# Altium PCB PCBFinal.PcbDoc
Units mm, origin at the board's own origin, x right, y up, seen from the top; angles counter-clockwise.
Board outline 97.5 x 97.5 mm, 2 copper layers (Top Layer, Bottom Layer), stack 0.671 mm thick; 19 components, 15 nets, 70 pads, 9 vias.
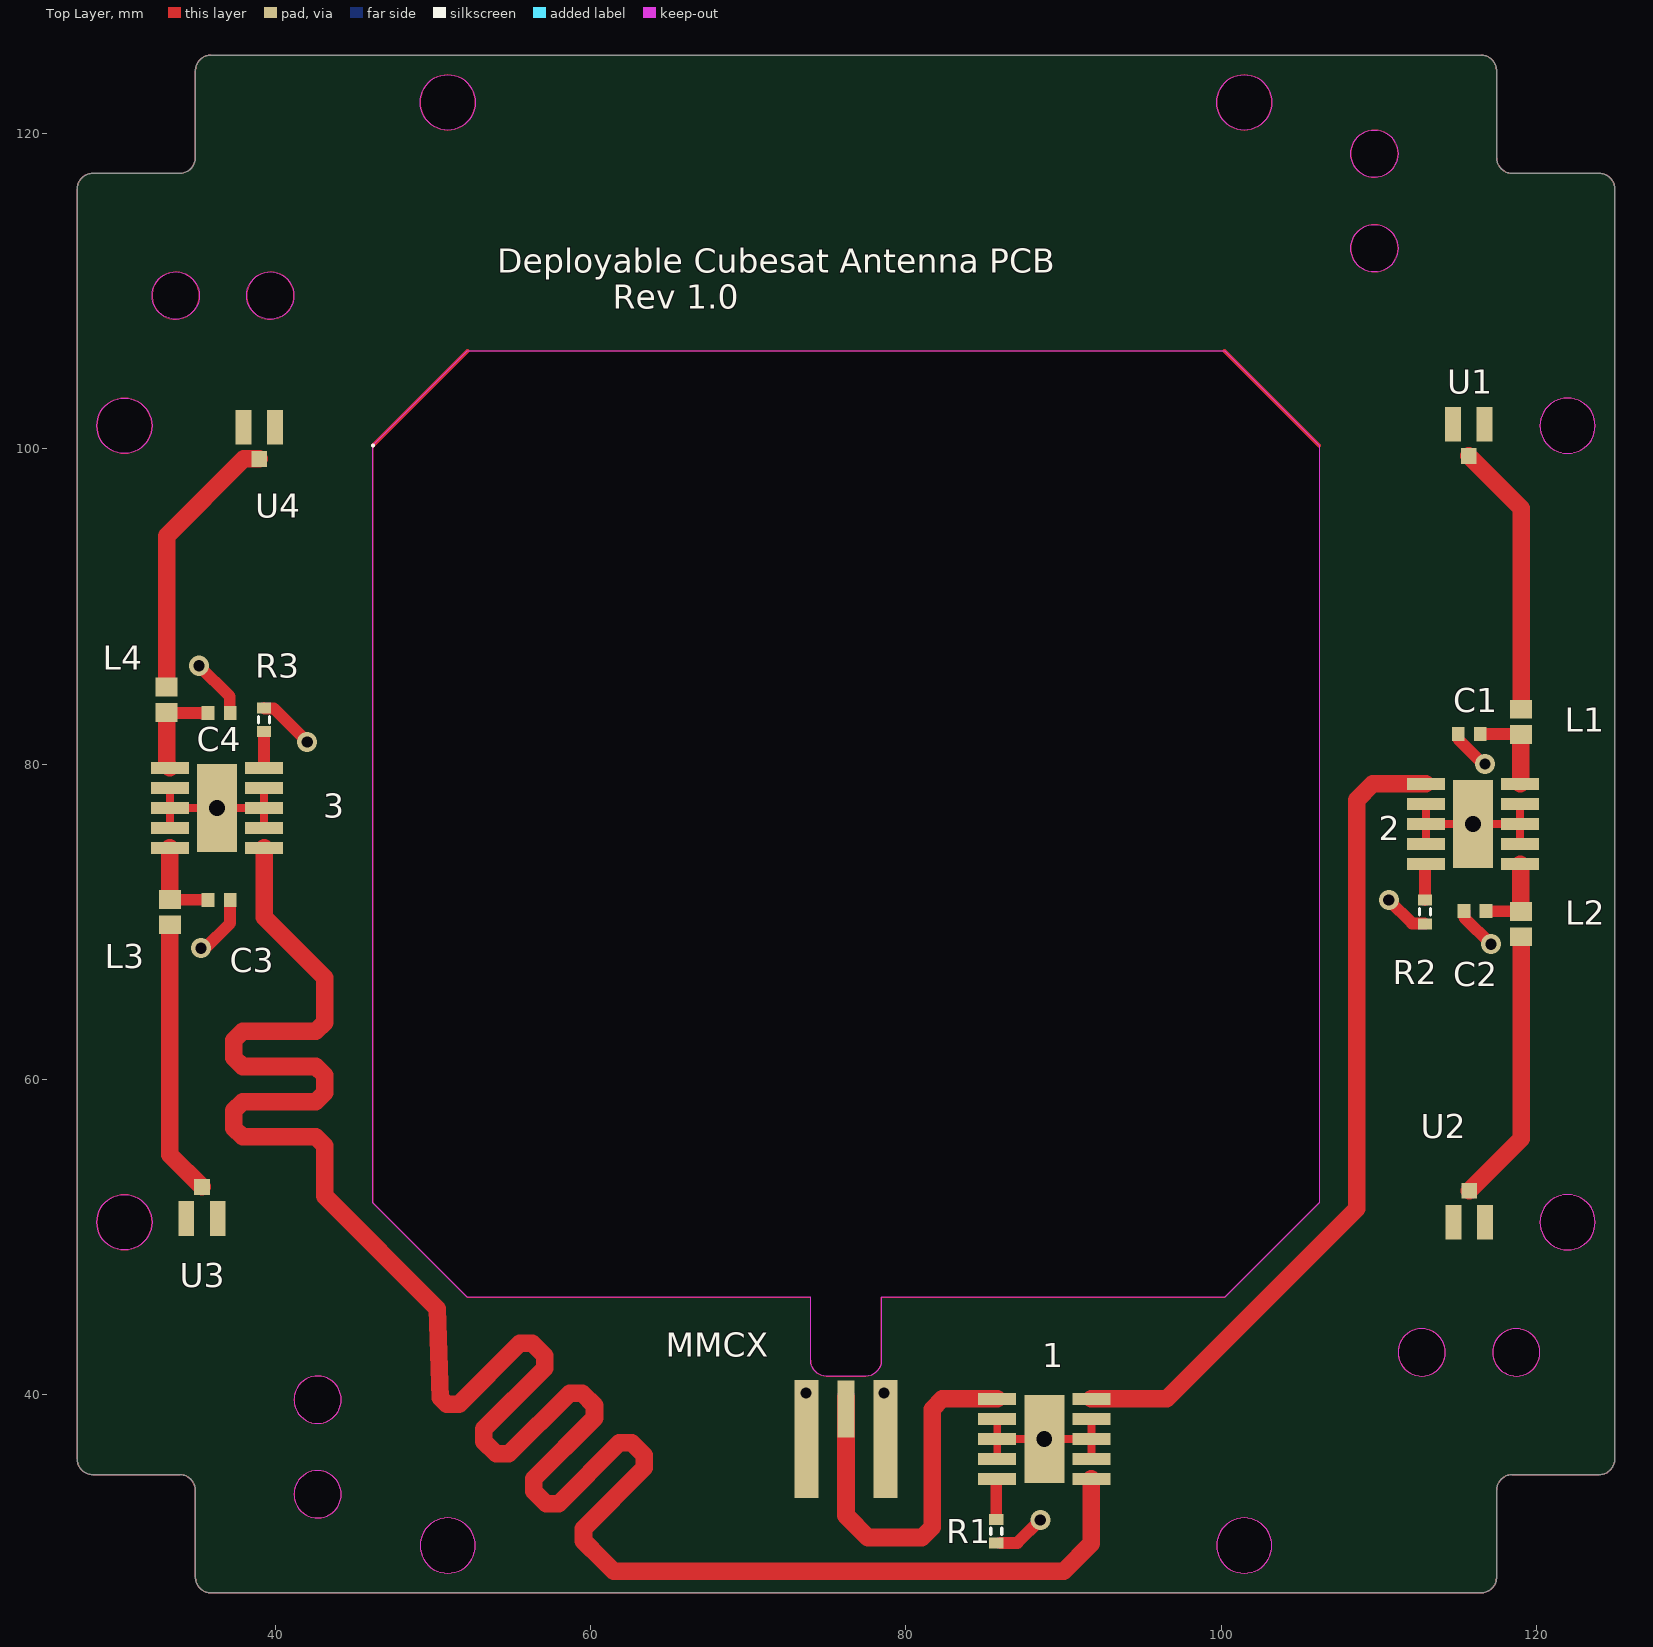
[diagram p0: Top Layer view]
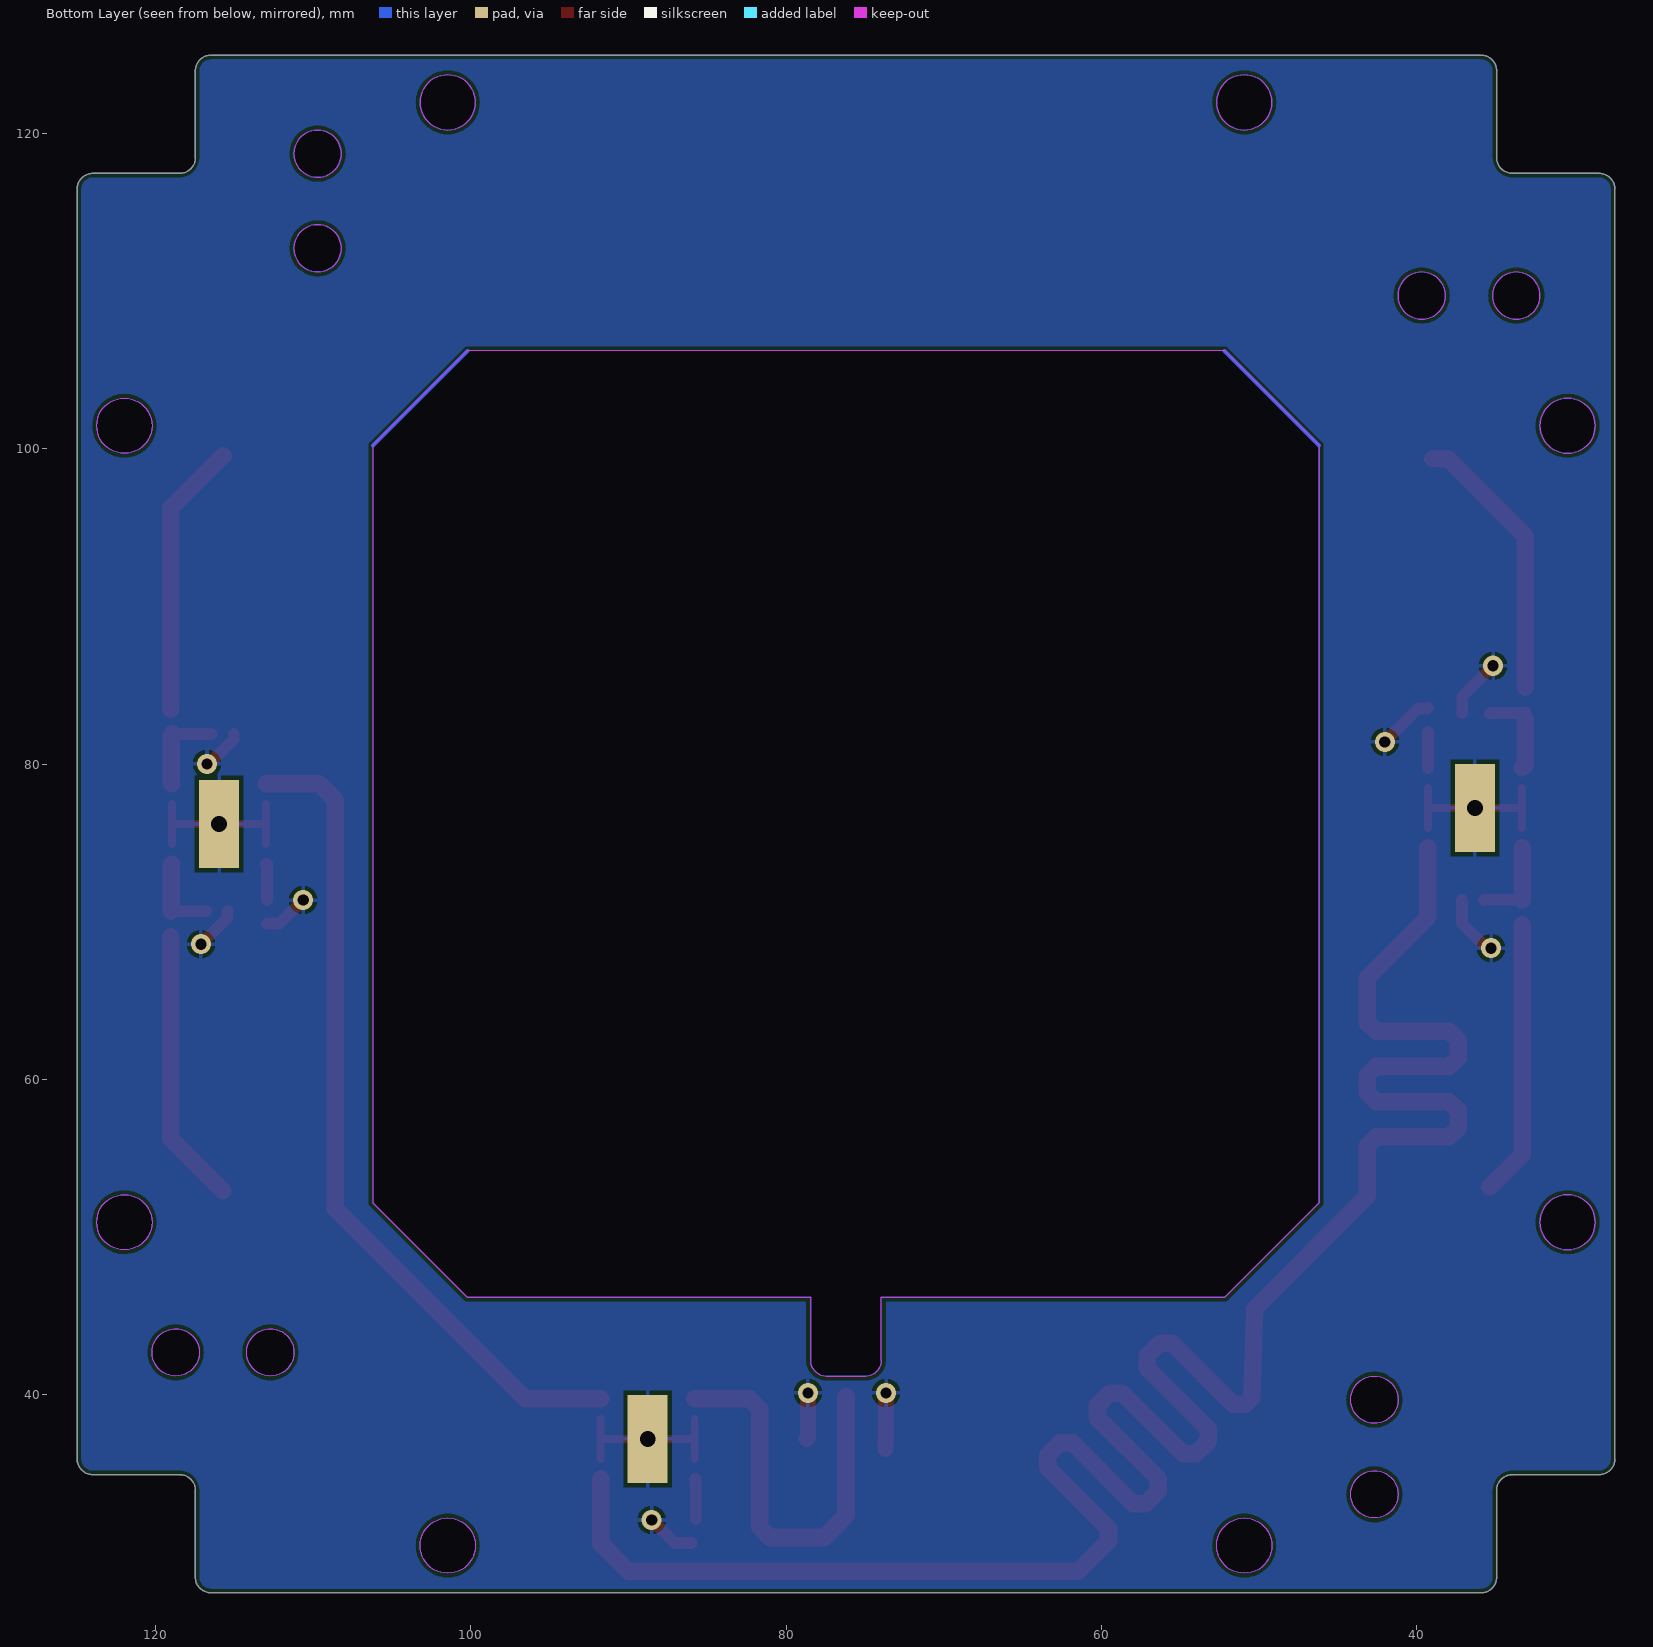
[diagram p1: Bottom Layer view, seen from below]

## Layer stack, top to bottom
Top Solder: solder mask 0.0102, Solder Resist, Dk 3.5
Top Layer: signal copper 0.0356
Dielectric 1: dielectric 0.6, FR-4, Dk 4.5
Bottom Layer: signal copper 0.0356

## Board outline
34.95,28.45 ccw(c35.95,28.45) 35.95,27.45 116.45,27.45 ccw(c116.45,28.45) 117.45,28.45 117.45,33.95 cw(c118.45,33.95) 118.45,34.95 123.95,34.95 ccw(c123.95,35.95) 124.95,35.95 124.95,116.45 ccw(c123.95,116.45) 123.95,117.45 118.45,117.45 cw(c118.45,118.45) 117.45,118.45 117.45,123.95 ccw(c116.45,123.95) 116.45,124.95 35.95,124.95 ccw(c35.95,123.95) 34.95,123.95 34.95,118.45 cw(c33.95,118.45) 33.95,117.45 28.45,117.45 ccw(c28.45,116.45) 27.45,116.45 27.45,35.95 ccw(c28.45,35.95) 28.45,34.95 33.95,34.95 cw(c33.95,33.95) 34.95,33.95
cut-out: 41.2,33.7 ccw(c42.7,33.7) 42.7,32.2 ccw(c42.7,33.7) 44.2,33.7 ccw(c42.7,33.7) 42.7,35.2 ccw(c42.7,33.7)
cut-out: 41.2,39.7 ccw(c42.7,39.7) 42.7,38.2 ccw(c42.7,39.7) 44.2,39.7 ccw(c42.7,39.7) 42.7,41.2 ccw(c42.7,39.7)
cut-out: 50.95,120.2 cw(c50.95,121.95) 49.2,121.95 cw(c50.95,121.95) 50.95,123.7 cw(c50.95,121.95) 52.7,121.95 cw(c50.95,121.95)
cut-out: 33.7,108.2 cw(c33.7,109.7) 32.2,109.7 cw(c33.7,109.7) 33.7,111.2 cw(c33.7,109.7) 35.2,109.7 cw(c33.7,109.7)
cut-out: 39.7,108.2 cw(c39.7,109.7) 38.2,109.7 cw(c39.7,109.7) 39.7,111.2 cw(c39.7,109.7) 41.2,109.7 cw(c39.7,109.7)
cut-out: 30.45,99.7 cw(c30.45,101.45) 28.7,101.45 cw(c30.45,101.45) 30.45,103.2 cw(c30.45,101.45) 32.2,101.45 cw(c30.45,101.45)
cut-out: 30.45,99.7 cw(c30.45,101.45) 28.7,101.45 cw(c30.45,101.45) 30.45,103.2 cw(c30.45,101.45) 32.2,101.45 cw(c30.45,101.45)
cut-out: 30.45,49.2 cw(c30.45,50.95) 28.7,50.95 cw(c30.45,50.95) 30.45,52.7 cw(c30.45,50.95) 32.2,50.95 cw(c30.45,50.95)
cut-out: 49.2,30.45 ccw(c50.95,30.45) 50.95,28.7 ccw(c50.95,30.45) 52.7,30.45 ccw(c50.95,30.45) 50.95,32.2 ccw(c50.95,30.45)
cut-out: 99.7,30.45 ccw(c101.45,30.45) 101.45,28.7 ccw(c101.45,30.45) 103.2,30.45 ccw(c101.45,30.45) 101.45,32.2 ccw(c101.45,30.45)
cut-out: 111.2,42.7 ccw(c112.7,42.7) 112.7,41.2 ccw(c112.7,42.7) 114.2,42.7 ccw(c112.7,42.7) 112.7,44.2 ccw(c112.7,42.7)
cut-out: 117.2,42.7 ccw(c118.7,42.7) 118.7,41.2 ccw(c118.7,42.7) 120.2,42.7 ccw(c118.7,42.7) 118.7,44.2 ccw(c118.7,42.7)
cut-out: 120.2,50.95 ccw(c121.95,50.95) 121.95,49.2 ccw(c121.95,50.95) 123.7,50.95 ccw(c121.95,50.95) 121.95,52.7 ccw(c121.95,50.95)
cut-out: 120.2,101.45 ccw(c121.95,101.45) 121.95,99.7 ccw(c121.95,101.45) 123.7,101.45 ccw(c121.95,101.45) 121.95,103.2 ccw(c121.95,101.45)
cut-out: 109.7,111.2 cw(c109.7,112.7) 108.2,112.7 cw(c109.7,112.7) 109.7,114.2 cw(c109.7,112.7) 111.2,112.7 cw(c109.7,112.7)
cut-out: 109.7,117.2 cw(c109.7,118.7) 108.2,118.7 cw(c109.7,118.7) 109.7,120.2 cw(c109.7,118.7) 111.2,118.7 cw(c109.7,118.7)
cut-out: 101.45,120.2 cw(c101.45,121.95) 99.7,121.95 cw(c101.45,121.95) 101.45,123.7 cw(c101.45,121.95) 103.2,121.95 cw(c101.45,121.95)
cut-out: 52.2,46.2 46.2,52.2 46.2,100.2 52.2,106.2 100.2,106.2 106.2,100.2 106.2,52.2 100.2,46.2 78.45,46.2 78.45,42.2 cw(c77.45,42.2) 77.45,41.2 74.95,41.2 cw(c74.95,42.2) 73.95,42.2 73.95,46.2

## Design rules (kind name [scope] priority, off if disabled: settings)
Clearance [All] p1: gap=0.254 ignorepadtopadclearanceinfootprint=FALSE except(0: Arc-Hole Track-Hole SMDPad-Hole THPad-Hole Via-Hole Fill-Hole Poly-Hole Region-Hole Text-Hole)
PolygonConnect [All] p1: connectstyle=Relief reliefconductorwidth=0.254 reliefentries=4 polygonreliefangle="90 Angle" airgapwidth=0.254
RoomDefinition PCBSchematic [InComponentClass('PCBSchematic')] p1: confinementstyle=ConfineIn formatcopy=TRUE lockcomponents=FALSE outline 22.344,10.668 128.516,10.668 128.516,131.445 22.344,131.445
RoutingVias [All] p1: holewidth=0.711 width=1.27 viastyle="Through Hole" minholewidth=0.711 minwidth=1.27 maxholewidth=0.711 maxwidth=1.27
SolderMaskExpansion [All] p1: expansion=0.102
Width [All] p1: maxlimit=1.116 minlimit=0.5 preferedwidth=1 minimp=50.000000 maximp=50.000000 favimp=50.000000
30 further rules are at their usual default settings.

## Classes and differential pairs
component class PCBSchematic: 1 2 3 C1 C2 C3 C4 L1 L2 L3 MMCX R2 U1 U2 U3 U4

## Components (designator, comment, footprint, x,y, rotation, side; value= is the part's Value field where it differs from the comment)
1 "DNP" QBA07 85.788,34.671 r90 top
2 "DNP" QBA07 112.966,73.66 r90 top
3 "DNP" QBA07 39.306,79.756 r270 top
C1 "Cap Semi" 1608[0603] 115.714,81.915 r180 top value=15pF
C2 "Cap Semi" 1608[0603] 116.078,70.682 r0 top value=15pF
C3 "Cap Semi" 1608[0603] 36.449,71.374 r0 top value=15pF
C4 "Cap Semi" 1608[0603] 36.449,83.229 r180 top value=15pF
L1 "Inductor" 2029 118.999,82.677 r90 top value=18mH
L2 "Inductor" 2029 118.999,69.85 r90 top value=18mH
L3 "Inductor" 2029 33.337,70.612 r270 top value=18mH
L4 "Inductor" 2029 33.126,84.074 r90 top value=18mH
MMCX "DNP" MMCX 73.7,37.211 r0 top
R1 "Res3" J1-0603 85.725,31.369 r270 top value=50
R2 "Res3" J1-0603 112.903,70.624 r270 top value=50
R3 "Res3" J1-0603 39.306,82.804 r90 top value=50
U1 "DNP" U.fl 115.68,99.536 r0 top
U2 "DNP" U.fl 115.714,52.95 r180 top
U3 "DNP" U.fl 35.368,53.193 r180 top
U4 "DNP" U.fl 39,99.346 r0 top

## Footprints (in the part's own frame and the unit in brackets; to place one, negate y for a bottom-side part, rotate by r counter-clockwise, add the part's x,y. Pads: shape width x height; smd on the part's side, far side on the other; paste and mask are expansions set on the pad)
1608[0603] [mm] "Chip Capacitor, Body 1.6x0.8mm, IPC High Density"
  rect 0.8x0.9 smd: 1(-0.7,0) 2(0.7,0)
  body extent -0.87,-0.48 0.87,0.48, height 1.3
2029 [mm] "Chip Inductor, Body 2.0x1.2mm, IPC High Density"
  rect 1.2x1.4 smd: 1(-0.8,0) 2(0.8,0)
  body extent -1.1,-0.7 1.1,0.7, height 0.55
J1-0603 [mm] "Chip Resistor, Body 1.6x0.8mm, IPC High Density"
  rect 0.7x0.9 smd: 1(-0.75,0) 2(0.75,0)
  silkscreen extent -0.2,-0.35 0.2,0.35, body extent -0.85,-0.48 0.85,0.48, height 0.9
MMCX [mm]
  rect 1.5x7.5 smd: 7(0,0) 9(5,0)
  rect 1.1x3.624 smd: 8(2.5,1.905)
  body extent -0.86,0.19 5.84,9.72, height 2.49
QBA07 [mm]
  rect 0.76x2.41 smd: 10(0,0) 11(1.27,0) 12(2.54,0) 13(3.81,0) 14(5.08,0) 15(5.08,-5.969) 16(3.81,-5.969) 17(2.54,-5.969) 18(1.27,-5.969) 19(0,-5.969)
  rect 5.588x2.54 hole 1: 31(2.54,-2.984)
  body extent -1.27,-6.98 6.35,1.15, height 1.5
U.fl [mm]
  rect 1x2.2 smd: 23(-0.999,2) 25(1,2)
  rect 1x1 smd: 24(0,0)
  body extent -1.5,0.1 1.5,3.2, height 1.25

## Part data
1 2 3: library part QBA-07
C1 C2 C3 C4: "Capacitor (Semiconductor SIM Model)", LatestRevisionDate=29-May-2009, LatestRevisionNote="IPC-7351 Footprint Added.", PackageDescription="Chip Capacitor", PackageReference=C1206, Published=8-Jun-2000, Publisher="Altium Limited"
MMCX: library part "MMCX Jack"
R1 R2 R3: "Resistor", LatestRevisionDate=29-May-2009, LatestRevisionNote="IPC-7351 Footprint Added.", PackageDescription="Chip Resistor", PackageReference=J1-0603, Published=8-Jun-2000, Publisher="Altium Limited"
U1 U2 U3 U4: library part U.fl
L1 L2 L3 L4: Code_IEC=1005, Code_JEITA=0402, LatestRevisionDate=29-May-2009, LatestRevisionNote="IPC-7351 Footprint Added.", PackageDescription="Chip Inductor", PackageReference=0402-A, Published=8-Jun-2000, Publisher="Altium Limited"

## Via types
v1: diameter 1.27, hole 0.711, Top Layer to Bottom Layer, 9 vias

## Nets (pads, with @x,y where several pads share a name; then routed paths per layer and width w, separated by ;. In a path a pad name is that pad's centre, name@x,y a point inside that pad or via, vN(x,y) a via of type N, cw(c..) or ccw(c..) an arc to the next point about the centre after c; other vN are vias at no path point)
GND: 1.11 1.12 1.13 1.16 1.17 1.18 1.31 2.11 2.12 2.13 2.16 2.17 2.18 2.31 3.11 3.12 3.13 3.16 3.17 3.18 3.31 C1.2 C2.1 C3.2 C4.1 MMCX.7 MMCX.9 R1.2 R2.2 R3.2 | length 62.7
  Top Layer w0.5: 3.16 3.17 ; 3.18 3.17 ; 3.13 3.12 ; 3.11 3.12 ; 1.11 1.12 ; 1.13 1.12 ; 1.18 1.17 ; 1.16 1.17 ; 2.11 2.12 ; 2.13 2.12 ; 2.18 2.17 ; 2.16 2.17 ; 3.17 3.31 3.12 ; 1.12 1.31 1.17 ; 2.12 2.31 2.17
  Top Layer w0.75: v1(35.179,86.233) 37.124,84.288 37.124,83.254 C4.1 ; v1(35.306,68.326) 35.56,68.326 37.149,69.915 C3.2 ; R3.2 39.331,83.529 39.915,83.529 v1(42.037,81.407) ; R1.2@85.979,30.619 87.065,30.619 v1(88.519,32.073) ; v1(110.617,71.374) 112.092,69.899 112.878,69.899 R2.2 ; C1.2 115.014,81.575 116.579,80.01 v1(116.713,80.01) ; C2.1 115.403,70.657 115.403,70.271 v1(117.094,68.58)
  Top Layer w1: v1(73.66,40.132) 73.66,37.171 MMCX.7 MMCX.7@73.7,36.576 ; v1(78.613,40.132) 78.613,37.298 MMCX.9
Net1_10: 1.10 R1.1 | length 2.6
  Top Layer w0.75: R1.1 85.725,34.666 85.73,34.671 1.10
Net1_14: 1.14 MMCX.8 | length 25.7
  Top Layer w1.116: MMCX.8@76.2,39.878 MMCX.8 76.2,32.357 77.597,30.96 81.007,30.96 81.661,31.614 81.661,39.097 82.315,39.751 1.14
Net1_15: 1.15 2.14 | length 52.5
  Top Layer w1.116: 1.15 96.532,39.751 108.585,51.804 108.585,77.724 109.601,78.74 2.14
Net1_19: 1.19 3.14 | length 146
  Top Layer w1.116: 3.14 39.306,70.294 40.767,68.834 40.777,68.824 42.355,67.246 43.145,66.456 43.145,65.289 43.145,63.615 42.587,63.057 37.946,63.057 37.388,62.499 37.388,61.383 37.946,60.825 42.587,60.825 43.145,60.267 43.145,59.151 42.587,58.593 37.946,58.593 37.388,58.035 37.388,56.919 37.946,56.361 42.587,56.361 43.145,55.803 43.145,55.245 43.145,52.613 50.292,45.466 50.482,39.814 50.877,39.42 51.666,39.42 55.523,43.276 56.312,43.276 57.101,42.487 57.101,41.698 53.244,37.842 53.244,37.053 54.034,36.263 54.823,36.263 58.679,40.12 59.468,40.12 60.258,39.331 60.258,38.542 56.401,34.685 56.401,33.896 57.19,33.107 57.979,33.107 61.836,36.963 62.625,36.963 63.414,36.174 63.414,35.385 59.558,31.529 59.558,30.739 60.741,29.556 61.468,28.829 62.357,28.829 90.004,28.829 91.757,30.582 1.19
Net2_10: 2.10 R2.1 | length 2.3
  Top Layer w0.75: R2.1 112.903,73.655 112.908,73.66 2.10
Net2_15: 2.15 C1.1 L1.1 | length 5.8
  Top Layer w0.75: C1.1 116.433,81.896 118.917,81.896 118.98,81.896 L1.1
  Top Layer w1.116: L1.1@118.898,81.915 118.917,81.896 118.967,81.845 118.967,78.772 2.15
Net2_19: 2.19 C2.2 L2.2 | length 5.2
  Top Layer w0.75: C2.2 116.794,70.666 118.983,70.666 L2.2
  Top Layer w1.116: 2.19 118.967,73.628 118.967,70.682 L2.2@118.983,70.666
Net3_10: 3.10 R3.1 | length 2.3
  Top Layer w0.75: 3.10 R3.1
Net3_15: 3.15 C3.1 L3.1 | length 5.5
  Top Layer w0.75: L3.1 33.356,71.393 35.73,71.393 C3.1
  Top Layer w1.116: L3.1 3.15@33.338,74.486
Net3_19: 3.19 C4.2 L4.1 | length 5.5
  Top Layer w0.75: L4.1 33.17,83.229 35.343,83.229 35.368,83.204 C4.2@35.368,83.185
  Top Layer w1.116: L4.1@33.147,82.881 33.147,79.934 33.325,79.756 3.19
NetL1_2: L1.2 U1.24 | length 17.4
  Top Layer w1.116: U1.24 118.999,96.217 L1.2
NetL2_1: L2.1 U2.24 | length 17.5
  Top Layer w1.116: U2.24 118.999,56.235 L2.1
NetL3_2: L3.2 U3.24 | length 17.5
  Top Layer w1.116: L3.2 33.338,55.223 U3.24
NetL4_1: L4.2 U4.24 | length 17.5
  Top Layer w1.116: L4.2 33.126,94.46 38.012,99.346 U4.24
pads on no net: U1.23 U1.25 U2.23 U2.25 U3.23 U3.25 U4.23 U4.25

## Polygon pours and split planes (outlines as drawn)
GND on Bottom Layer "Bottom Layer-GND" (solid, pour order 0): 34.95,28.45 ccw(c35.95,28.45) 35.95,27.45 116.45,27.45 ccw(c116.45,28.45) 117.45,28.45 117.45,33.95 cw(c118.45,33.95) 118.45,34.95 123.95,34.95 ccw(c123.95,35.95) 124.95,35.95 124.95,116.45 ccw(c123.95,116.45) 123.95,117.45 118.45,117.45 cw(c118.45,118.45) 117.45,118.45 117.45,123.95 ccw(c116.45,123.95) 116.45,124.95 35.95,124.95 ccw(c35.95,123.95) 34.95,123.95 34.95,118.45 cw(c33.95,118.45) 33.95,117.45 28.45,117.45 ccw(c28.45,116.45) 27.45,116.45 27.45,35.95 ccw(c28.45,35.95) 28.45,34.95 33.95,34.95 cw(c33.95,33.95) 34.95,33.95

## Other copper
Multi-Layer:
  circle w0.013: c42.7,33.7 r1.5
  circle w0.013: c42.7,33.7 r1.5
  circle w0.013: c42.7,39.7 r1.5
  circle w0.013: c42.7,39.7 r1.5
  circle w0.013: c112.7,42.7 r1.5
  circle w0.013: c118.7,42.7 r1.5
  circle w0.013: c109.7,112.7 r1.5
  circle w0.013: c109.7,118.7 r1.5
  circle w0.013: c121.95,101.45 r1.75
  circle w0.013: c101.45,121.95 r1.75
  circle w0.013: c30.45,101.45 r1.75
  circle w0.013: c101.45,30.45 r1.75
  circle w0.013: c30.45,50.95 r1.75
  circle w0.013: c50.95,30.45 r1.75
  circle w0.013: c50.95,121.95 r1.75
  circle w0.013: c121.95,50.95 r1.75
  circle w0.013: c39.7,109.7 r1.5
  circle w0.013: c33.7,109.7 r1.5
  circle w0.013: c50.95,121.95 r1.75
  circle w0.013: c121.95,50.95 r1.75
  circle w0.013: c50.95,30.45 r1.75
  circle w0.013: c30.45,50.95 r1.75
  circle w0.013: c101.45,30.45 r1.75
  circle w0.013: c30.45,101.45 r1.75
  circle w0.013: c101.45,121.95 r1.75
  circle w0.013: c121.95,101.45 r1.75
  circle w0.013: c112.7,42.7 r1.5
  circle w0.013: c118.7,42.7 r1.5
  circle w0.013: c33.7,109.7 r1.5
  circle w0.013: c39.7,109.7 r1.5
  circle w0.013: c109.7,112.7 r1.5
  circle w0.013: c109.7,118.7 r1.5
  lines w0.013: 27.45,103.7 27.45,35.95 ; 27.45,115.7 27.45,116.45 ; 36.7,27.45 35.95,27.45 ; 48.7,27.45 116.45,27.45 ; 52.2,106.2 100.2,106.2 ; 103.7,124.95 35.95,124.95 ; 106.2,100.2 106.2,52.2 100.2,46.2 ; 115.7,124.95 116.45,124.95 ; 124.95,36.7 124.95,35.95 ; 124.95,48.7 124.95,116.45 ; 27.45,35.95 ccw(c28.45,35.95) 28.45,34.95 ; 27.45,35.95 ccw(c28.45,35.95) 28.45,34.95 ; 27.45,35.95 27.45,116.45 ; 27.45,116.45 cw(c28.45,116.45) 28.45,117.45 ; 27.45,116.45 cw(c28.45,116.45) 28.45,117.45 ; 28.45,34.95 33.95,34.95 ; 28.45,34.95 33.95,34.95 ; 28.45,117.45 33.95,117.45 ; 28.45,117.45 33.95,117.45 ; 33.95,34.95 cw(c33.95,33.95) 34.95,33.95 ; 33.95,34.95 cw(c33.95,33.95) 34.95,33.95 ; 33.95,117.45 ccw(c33.95,118.45) 34.95,118.45 ; 33.95,117.45 ccw(c33.95,118.45) 34.95,118.45 ; 34.95,28.45 ccw(c35.95,28.45) 35.95,27.45 ; 34.95,28.45 ccw(c35.95,28.45) 35.95,27.45 ; 34.95,28.45 34.95,33.95 ; 34.95,28.45 34.95,33.95 ; 34.95,118.45 34.95,123.95 ; 34.95,118.45 34.95,123.95 ; 34.95,123.95 cw(c35.95,123.95) 35.95,124.95 ; 34.95,123.95 cw(c35.95,123.95) 35.95,124.95 ; 35.95,27.45 116.45,27.45 ; 35.95,124.95 116.45,124.95 ; 46.2,52.2 52.2,46.2 ; 46.2,52.2 46.2,52.324 46.2,100.2 46.2,52.2 ; 52.2,46.2 73.95,46.2 ; 52.2,46.2 73.95,46.2 ; 73.95,42.2 ccw(c74.95,42.2) 74.95,41.2 ; 73.95,42.2 ccw(c74.95,42.2) 74.95,41.2 ; 73.95,42.2 73.95,46.2 ; 73.95,42.2 73.95,46.2 ; 74.95,41.2 77.45,41.2 ; 74.95,41.2 77.45,41.2 ; 77.45,41.2 ccw(c77.45,42.2) 78.45,42.2 ; 77.45,41.2 ccw(c77.45,42.2) 78.45,42.2 ; 78.45,42.2 78.45,46.2 ; 78.45,42.2 78.45,46.2 ; 78.45,46.2 100.2,46.2 ; 78.45,46.2 100.2,46.2 ; 116.45,27.45 ccw(c116.45,28.45) 117.45,28.45 ; 116.45,27.45 ccw(c116.45,28.45) 117.45,28.45 ; 116.45,124.95 cw(c116.45,123.95) 117.45,123.95 ; 116.45,124.95 cw(c116.45,123.95) 117.45,123.95 ; 117.45,28.45 117.45,33.95 ; 117.45,28.45 117.45,33.95 ; 117.45,33.95 cw(c118.45,33.95) 118.45,34.95 ; 117.45,33.95 cw(c118.45,33.95) 118.45,34.95 ; 117.45,118.45 ccw(c118.45,118.45) 118.45,117.45 ; 117.45,118.45 ccw(c118.45,118.45) 118.45,117.45 ; 117.45,118.45 117.45,123.95 ; 117.45,118.45 117.45,123.95 ; 118.45,34.95 123.95,34.95 ; 118.45,34.95 123.95,34.95 ; 118.45,117.45 123.95,117.45 ; 118.45,117.45 123.95,117.45 ; 123.95,34.95 ccw(c123.95,35.95) 124.95,35.95 ; 123.95,34.95 ccw(c123.95,35.95) 124.95,35.95 ; 123.95,117.45 cw(c123.95,116.45) 124.95,116.45 ; 123.95,117.45 cw(c123.95,116.45) 124.95,116.45 ; 124.95,35.95 124.95,116.45
  lines w0.254: 46.2,100.2 52.2,106.2 ; 100.2,106.2 106.2,100.2

## Silkscreen, mask and mechanical layers (free items; w line width, h text height)
Top Overlay:
  lines w0.254: 46.2,100.2 46.2,100.2
  text "Deployable Cubesat Antenna PCB /            Rev 1.0" at 54.102,108.867 h1.52